# EAGLE board Transifer_HCT_panut (EAGLE 9.6.2)
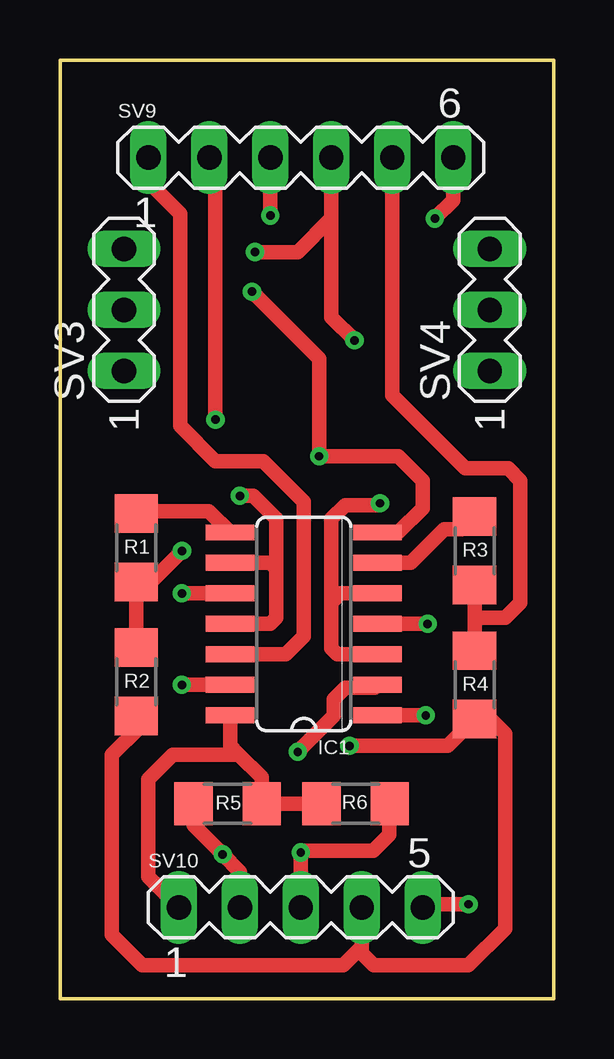
[diagram p0: board, top side]
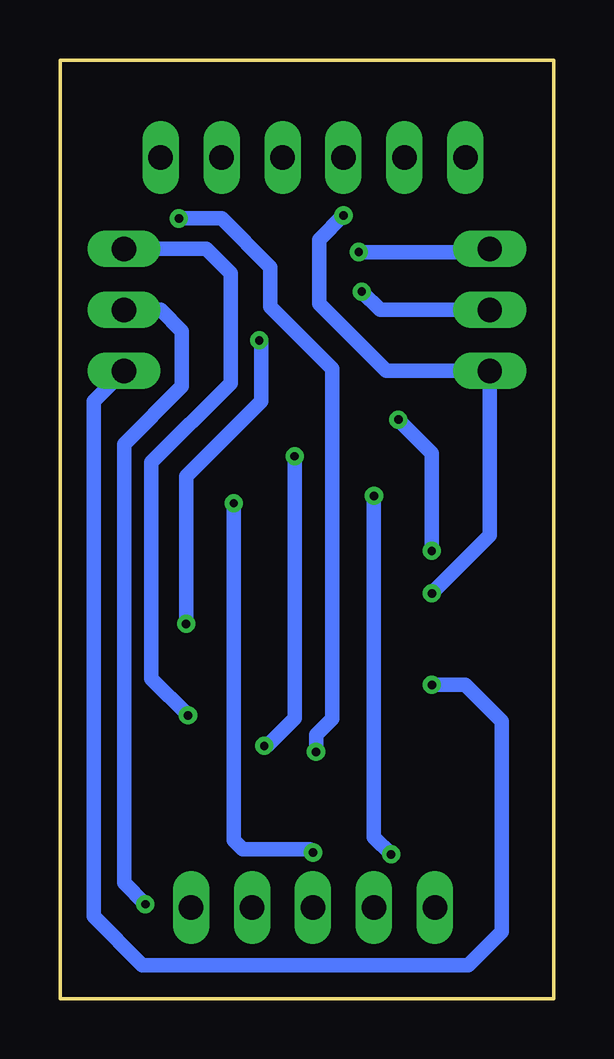
[diagram p1: board, bottom side, seen from below]

Size 20.57 x 39.12 mm. Coordinates in mm from the lower left corner, seen from the top.
Outline: 0,39.12 0,0 20.57,0 20.57,39.12 0,39.12
Copper layers (1*16): Top 0.035mm / dielectric 1.5mm / Bottom 0.035mm
Design rules "default *": minimum track width 6mil, minimum drill 0.35mm, track to track 20mil, track to pad 20mil, pad to pad 20mil, via to via 20mil, smd to smd 20mil, copper to edge 40mil, drill to drill 6mil, minimum pad ring 10mil, minimum via ring 8mil, stop-mask expansion 4mil, vias tented up to drill 0mil, thermal gap 10mil

## Footprints (pad centres in the part's own frame; a part is rotated, then mirrored left to right if it is on the bottom)
SO14 = smd 0.66 x 2.032: 1 -3.81,-3.073; 2 -2.54,-3.073; 3 -1.27,-3.073; 4 0,-3.073; 5 1.27,-3.073; 6 2.54,-3.073; 7 3.81,-3.073; 8 3.81,3.073; 9 2.54,3.073; 10 1.27,3.073; 11 0,3.073; 12 -1.27,3.073; 13 -2.54,3.073; 14 -3.81,3.073
R1206 = smd 1.6 x 1.803: 1 -1.422,0; 2 1.422,0
MA03-1 = drill 1.016 long: 1 -2.54,0; 2 0,0; 3 2.54,0
MA06-1 = drill 1.016 long: 1 -6.35,0; 2 -3.81,0; 3 -1.27,0; 4 1.27,0; 5 3.81,0; 6 6.35,0
MA05-1 = drill 1.016 long: 1 -5.08,0; 2 -2.54,0; 3 0,0; 4 2.54,0; 5 5.08,0

## Placement (x,y rotation side)
IC1  74HCT125D  [SO14]  10.16,15.62 90 top
R1  [R1206]  3.17,18.8 270 top
R2  [R1206]  3.17,13.21 270 top
R3  [R1206]  17.27,18.67 270 top
R4  [R1206]  17.27,13.08 270 top
R5  10k  [R1206]  6.99,8.13 0 top
R6  10k  [R1206]  12.32,8.13 180 top
SV3  [MA03-1]  2.67,28.7 90 top
SV4  [MA03-1]  17.91,28.7 90 top
SV9  [MA06-1]  10.03,35.05 0 top
SV10  [MA05-1]  10.03,3.81 0 top

## Library data of the parts
IC1 = 74xx-eu
R1-R6 = resistor
SV3 SV4 SV9 SV10 = con-lstb; OC_FARNELL: unknown; OC_NEWARK: unknown

## Nets
1OE_HCT: IC1.1 SV4.3
3V3_IC: SV4.2 SV10.5
4OE_HCT: IC1.13 SV4.1
DIR_MX: IC1.4 SV3.3 SV9.4
DIR_XL: IC1.10 SV3.1 SV9.3
GND: IC1.7 R2.2 R4.2 SV3.2 SV10.4
RX_HCT_MX: IC1.6 R3.1
RX_HCT_XL: IC1.8 R1.1
RX_MX: R3.2 R4.1 SV9.5
RX_XL: R1.2 R2.1 SV9.2
TTL_MX: IC1.3 IC1.5 R6.1 SV10.3
TTL_XL: IC1.9 IC1.11 R5.1 SV10.2
TX_MX: IC1.2 SV9.6
TX_XL: IC1.12 SV9.1
VCC: IC1.14 R5.2 R6.2 SV10.1

## Tracks (layer width: path | path; a pad name or v marks a point on that pad's centre or on a via)
1OE_HCT  (via drill 0.35)
  Top 0.61: IC1.1 v15.24,11.81
  Bottom 0.61: v15.24,11.81 16.76,13.34 16.76,22.35 13.46,25.65 13.46,30.23 14.48,31.24 SV4.3
3V3_IC  (via drill 0.35)
  Top 0.61: SV10.5 15.24,3.94 v17.02,3.94
  Bottom 0.61: v17.02,3.94 17.91,4.83 17.91,23.11 15.49,25.53 15.49,27.81 16.38,28.7 SV4.2
4OE_HCT  (via drill 0.35)
  Top 0.61: v5.08,13.08 IC1.13
  Bottom 0.61: SV4.1 19.18,24.89 19.18,3.43 17.14,1.4 3.56,1.4 2.16,2.79 2.16,11.56 3.68,13.08 v5.08,13.08
DIR_MX  (via drill 0.35)
  Top 0.61: v8.13,31.11 9.91,31.11 11.3,32.51 SV9.4 11.3,28.4 v12.27,27.43 | IC1.4 v15.32,15.62
  Bottom 0.61: v8.13,31.11 2.79,31.11 SV3.3 | v15.32,15.62 15.32,21.77 12.19,24.89 12.19,27.35 v12.27,27.43
DIR_XL  (via drill 0.35)
  Top 0.61: SV9.3 v8.76,32.64 | IC1.10 v5.08,16.89
  Bottom 0.61: v8.76,32.64 9.78,31.62 9.78,28.96 6.99,26.16 SV3.1 2.67,19.3 v5.08,16.89
GND  (via drill 0.35)
  Top 0.61: R2.2 3.3,11.66 3.3,11.3 2.16,10.16 2.16,2.67 3.43,1.4 11.81,1.4 12.57,2.16 SV10.4 12.57,1.91 13.08,1.4 17.02,1.4 18.54,2.92 18.54,11.05 17.93,11.66 R4.2 16.15,10.54 v12.06,10.54 | v8,29.46 10.79,26.67 v10.79,22.61 14.1,22.61 15.11,21.59 15.11,20.45 14.1,19.43 IC1.7
  Bottom 0.61: SV3.2 7.24,28.7 v8,29.46 | v10.79,22.61 10.79,11.68 11.94,10.54 v12.06,10.54
RX_HCT_MX
  Top 0.61: R3.1 16.74,19.56 16,19.56 14.6,18.16 IC1.6
RX_HCT_XL
  Top 0.61: IC1.8 6.2,20.32 3.28,20.32 R1.1
RX_MX
  Top 0.61: R3.2 17.27,15.88 | 17.27,15.88 R4.1 | 17.27,15.88 18.54,15.88 19.18,16.51 19.18,21.59 18.67,22.1 16.89,22.1 13.84,25.15 SV9.5
RX_XL  (via drill 0.35)
  Top 0.61: R1.2 3.17,16.75 | 3.17,16.75 R2.1 | SV9.2 6.48,34.8 v6.48,24.13 | v5.08,18.66 3.17,16.75
  Bottom 0.61: v6.48,24.13 5.08,22.74 v5.08,18.66
TTL_MX  (via drill 0.35)
  Top 0.61: IC1.5 11.68,16.89 11.3,16.51 | 11.3,16.51 11.3,14.61 11.56,14.35 IC1.3 | v13.33,20.65 13.26,20.57 11.88,20.57 11.3,20 11.3,16.51 | SV10.3 v10.03,6.1 10.1,6.16 13.05,6.16 13.72,6.83 13.72,8.1 R6.1
  Bottom 0.61: v13.33,20.65 13.33,6.6 12.95,6.22 10.16,6.22 v10.03,6.1
TTL_XL  (via drill 0.35)
  Top 0.61: R5.1 5.56,7.23 v6.78,6.02 7.49,5.3 SV10.2 | IC1.9 8.76,18.16 9.02,17.91 | 9.02,17.91 9.02,15.88 8.76,15.62 IC1.11 | v7.49,20.95 8.06,20.95 9.02,20 9.02,17.91
  Bottom 0.61: v7.49,20.95 7.49,6.73 v6.78,6.02
TX_MX  (via drill 0.35)
  Top 0.61: IC1.2 13.11,12.95 11.88,12.95 11.4,12.48 11.4,11.79 v9.91,10.29 | v15.62,32.51 16.38,33.27 SV9.6
  Bottom 0.61: v9.91,10.29 9.91,10.99 9.22,11.68 9.22,26.24 11.81,28.83 11.81,30.48 13.84,32.51 v15.62,32.51
TX_XL
  Top 0.61: IC1.12 9.4,14.35 10.16,15.11 10.16,20.7 8.46,22.4 6.48,22.4 5,23.87 5,32.72 3.68,34.04 SV9.1
VCC
  Top 0.61: 10.92,8.13 R6.2 R5.2 8.41,9.22 7.45,10.17 | IC1.14 7.09,10.54 7.45,10.17 | SV10.1 3.68,5.08 3.68,9.16 4.7,10.17 7.45,10.17